# EAGLE board Logic_Level_Bidirectional-Panel-v01 (EAGLE 6.5.0), part 1 of 4
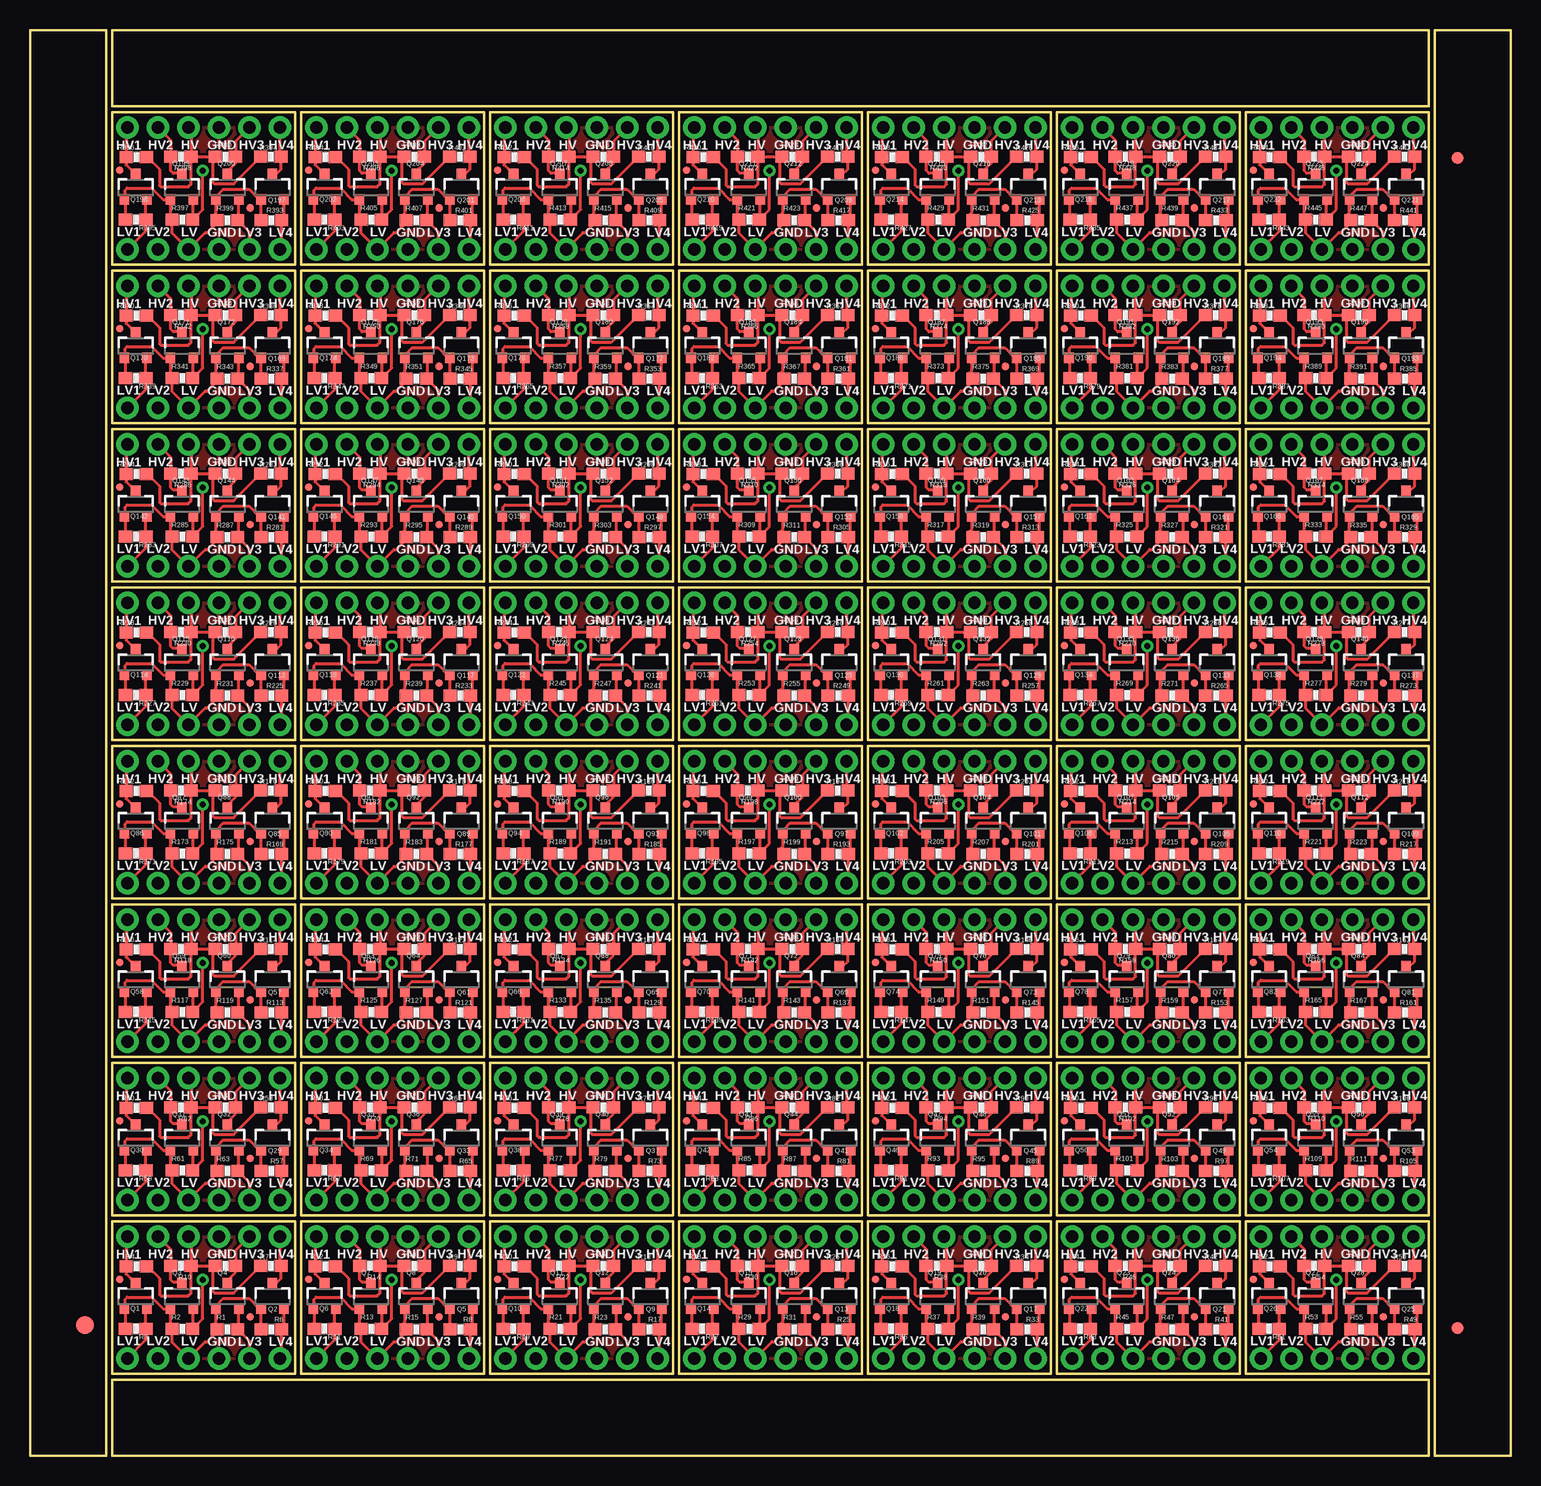
[diagram p0: board, top side]
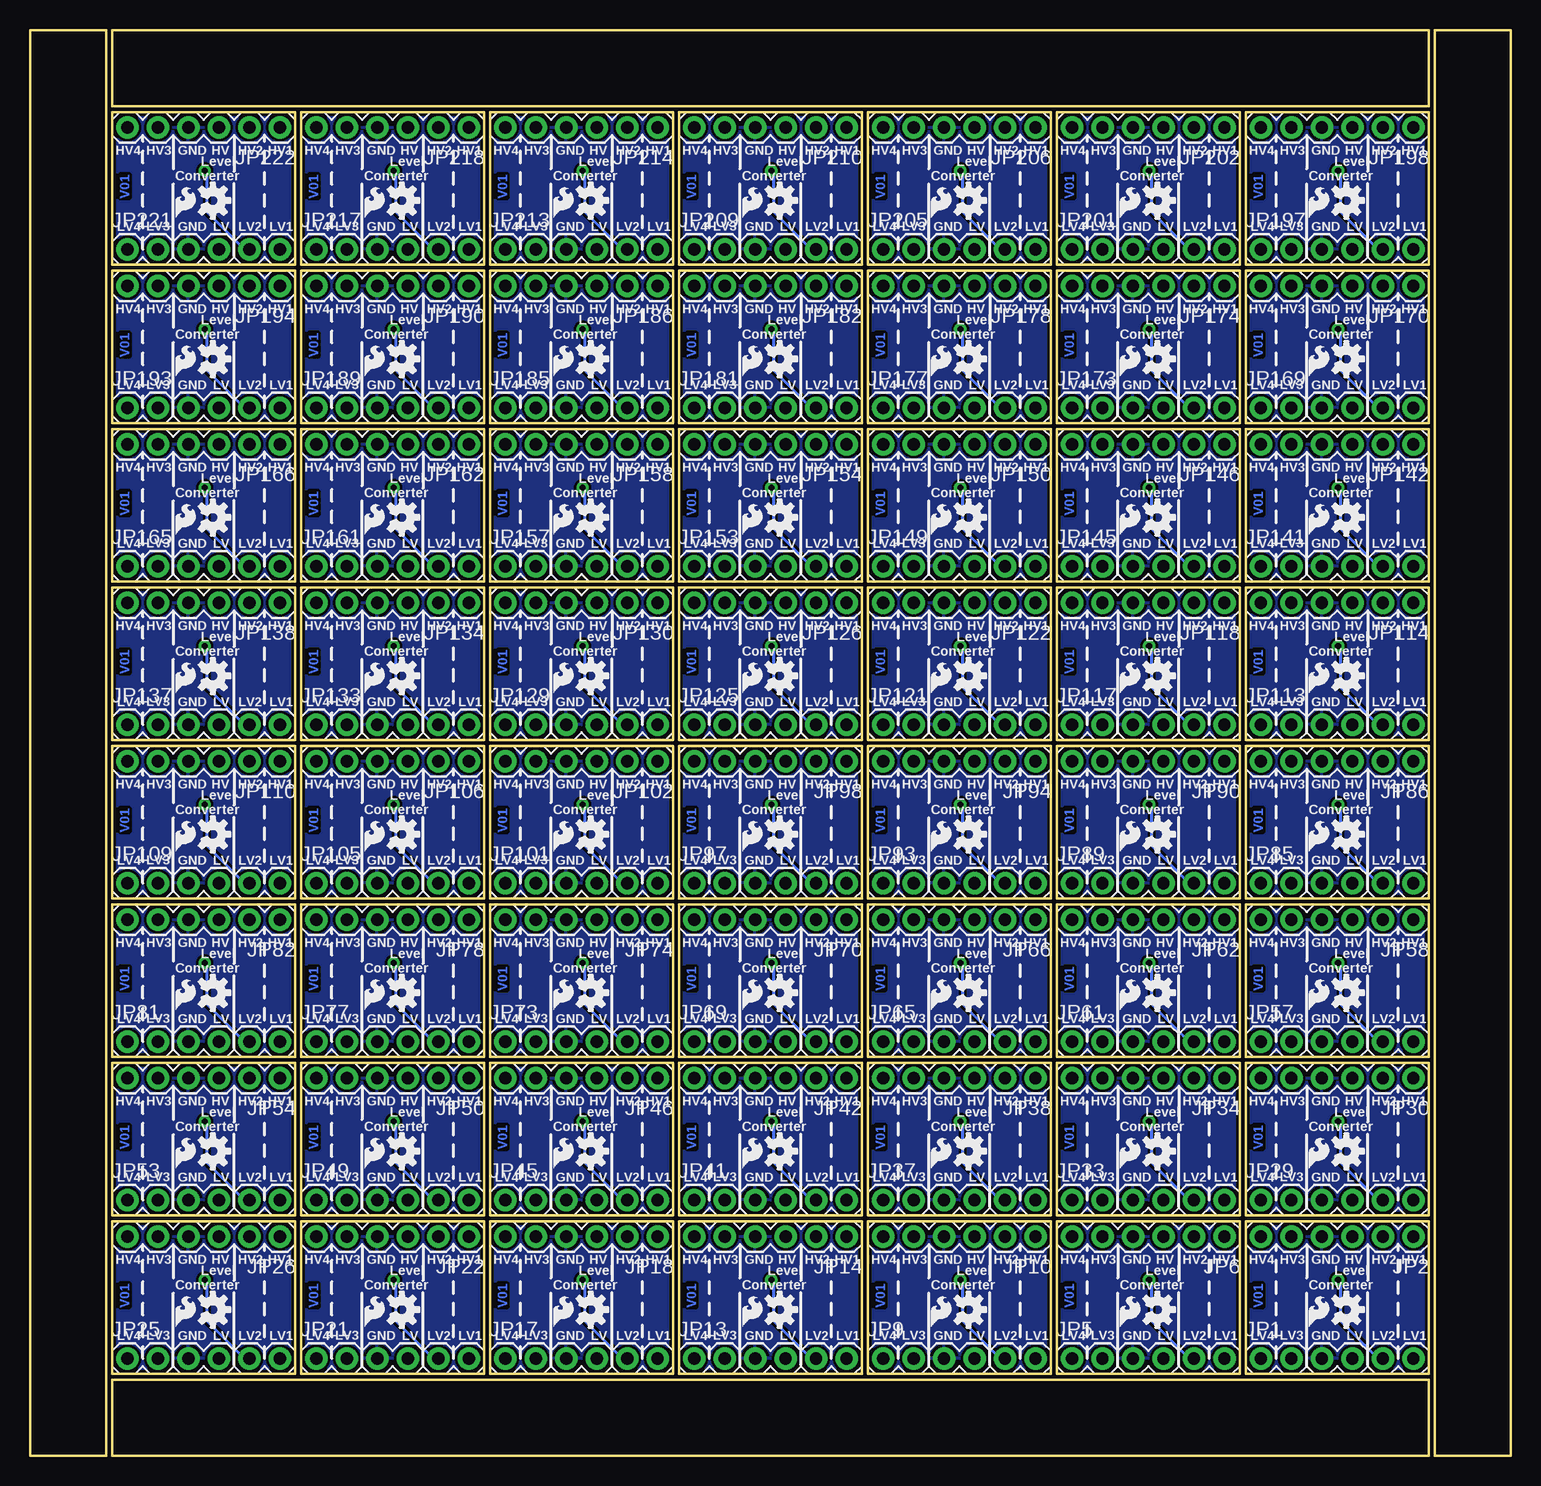
[diagram p1: board, bottom side, seen from below]

Size 123.44 x 118.87 mm. Coordinates in mm from the lower left corner, seen from the top.
Outline: 240 segments
Copper layers (1*16): Top 0.035mm / dielectric 1.5mm / Bottom 0.035mm
Design rules "SparkFun *": minimum track width 7mil, minimum drill 15mil, track to track 8mil, track to pad 8mil, pad to pad 8mil, via to via 8mil, smd to smd 8mil, copper to edge 8mil, drill to drill 8mil, minimum pad ring 12mil, minimum via ring 10mil, stop-mask expansion 4mil, vias tented up to drill 20mil, thermal gap 10mil

## Footprints (pad centres in the part's own frame; a part is rotated, then mirrored left to right if it is on the bottom)
FIDUCIAL-1.5X3 = smd 1.5 x 1.5: 1 0,0
FIDUCIAL-1X2 = smd 1 x 1: 1 0,0
1X06 = drill 1.016 pad 1.88: 1 0,0; 2 2.54,0; 3 5.08,0; 4 7.62,0; 5 10.16,0; 6 12.7,0
MICRO-FIDUCIAL = smd 0.635 x 0.635: 1 0,0
SOT23-3 = smd 0.8 x 0.9: 1 -0.95,-1; 2 0.95,-1; 3 0,1.1
0603-RES = smd 1.1 x 1: 1 -0.85,0; 2 0.85,0

## Placement (x,y rotation side)
E$1  [FIDUCIAL-1.5X3]  4.57,10.92 0 top
E$4  [FIDUCIAL-1X2]  119,10.67 0 top
E$5  [FIDUCIAL-1X2]  119,108.2 180 top
JP1  [1X06]  20.83,8.13 0 bottom
JP2  [1X06]  8.13,18.29 180 bottom
JP3  FIDUCIALUFIDUCIAL  [MICRO-FIDUCIAL]  7.49,14.73 0 top
JP4  FIDUCIALUFIDUCIAL  [MICRO-FIDUCIAL]  18.34,11.58 0 top
JP5  [1X06]  36.58,8.13 0 bottom
JP6  [1X06]  23.88,18.29 180 bottom
JP7  FIDUCIALUFIDUCIAL  [MICRO-FIDUCIAL]  23.24,14.73 0 top
JP8  FIDUCIALUFIDUCIAL  [MICRO-FIDUCIAL]  34.09,11.58 0 top
JP9  [1X06]  52.32,8.13 0 bottom
JP10  [1X06]  39.62,18.29 180 bottom
JP11  FIDUCIALUFIDUCIAL  [MICRO-FIDUCIAL]  38.99,14.73 0 top
JP12  FIDUCIALUFIDUCIAL  [MICRO-FIDUCIAL]  49.83,11.58 0 top
JP13  [1X06]  68.07,8.13 0 bottom
JP14  [1X06]  55.37,18.29 180 bottom
JP15  FIDUCIALUFIDUCIAL  [MICRO-FIDUCIAL]  54.74,14.73 0 top
JP16  FIDUCIALUFIDUCIAL  [MICRO-FIDUCIAL]  65.58,11.58 0 top
JP17  [1X06]  83.82,8.13 0 bottom
JP18  [1X06]  71.12,18.29 180 bottom
JP19  FIDUCIALUFIDUCIAL  [MICRO-FIDUCIAL]  70.48,14.73 0 top
JP20  FIDUCIALUFIDUCIAL  [MICRO-FIDUCIAL]  81.33,11.58 0 top
JP21  [1X06]  99.57,8.13 0 bottom
JP22  [1X06]  86.87,18.29 180 bottom
JP23  FIDUCIALUFIDUCIAL  [MICRO-FIDUCIAL]  86.23,14.73 0 top
JP24  FIDUCIALUFIDUCIAL  [MICRO-FIDUCIAL]  97.08,11.58 0 top
JP25  [1X06]  115.32,8.13 0 bottom
JP26  [1X06]  102.62,18.29 180 bottom
JP27  FIDUCIALUFIDUCIAL  [MICRO-FIDUCIAL]  101.98,14.73 0 top
JP28  FIDUCIALUFIDUCIAL  [MICRO-FIDUCIAL]  112.83,11.58 0 top
JP29  [1X06]  20.83,21.34 0 bottom
JP30  [1X06]  8.13,31.5 180 bottom
JP31  FIDUCIALUFIDUCIAL  [MICRO-FIDUCIAL]  7.49,27.94 0 top
JP32  FIDUCIALUFIDUCIAL  [MICRO-FIDUCIAL]  18.34,24.79 0 top
JP33  [1X06]  36.58,21.34 0 bottom
JP34  [1X06]  23.88,31.5 180 bottom
JP35  FIDUCIALUFIDUCIAL  [MICRO-FIDUCIAL]  23.24,27.94 0 top
JP36  FIDUCIALUFIDUCIAL  [MICRO-FIDUCIAL]  34.09,24.79 0 top
JP37  [1X06]  52.32,21.34 0 bottom
JP38  [1X06]  39.62,31.5 180 bottom
JP39  FIDUCIALUFIDUCIAL  [MICRO-FIDUCIAL]  38.99,27.94 0 top
JP40  FIDUCIALUFIDUCIAL  [MICRO-FIDUCIAL]  49.83,24.79 0 top
JP41  [1X06]  68.07,21.34 0 bottom
JP42  [1X06]  55.37,31.5 180 bottom
JP43  FIDUCIALUFIDUCIAL  [MICRO-FIDUCIAL]  54.74,27.94 0 top
JP44  FIDUCIALUFIDUCIAL  [MICRO-FIDUCIAL]  65.58,24.79 0 top
JP45  [1X06]  83.82,21.34 0 bottom
JP46  [1X06]  71.12,31.5 180 bottom
JP47  FIDUCIALUFIDUCIAL  [MICRO-FIDUCIAL]  70.48,27.94 0 top
JP48  FIDUCIALUFIDUCIAL  [MICRO-FIDUCIAL]  81.33,24.79 0 top
JP49  [1X06]  99.57,21.34 0 bottom
JP50  [1X06]  86.87,31.5 180 bottom
JP51  FIDUCIALUFIDUCIAL  [MICRO-FIDUCIAL]  86.23,27.94 0 top
JP52  FIDUCIALUFIDUCIAL  [MICRO-FIDUCIAL]  97.08,24.79 0 top
JP53  [1X06]  115.32,21.34 0 bottom
JP54  [1X06]  102.62,31.5 180 bottom
JP55  FIDUCIALUFIDUCIAL  [MICRO-FIDUCIAL]  101.98,27.94 0 top
JP56  FIDUCIALUFIDUCIAL  [MICRO-FIDUCIAL]  112.83,24.79 0 top
JP57  [1X06]  20.83,34.54 0 bottom
JP58  [1X06]  8.13,44.7 180 bottom
JP59  FIDUCIALUFIDUCIAL  [MICRO-FIDUCIAL]  7.49,41.15 0 top
JP60  FIDUCIALUFIDUCIAL  [MICRO-FIDUCIAL]  18.34,38 0 top
JP61  [1X06]  36.58,34.54 0 bottom
JP62  [1X06]  23.88,44.7 180 bottom
JP63  FIDUCIALUFIDUCIAL  [MICRO-FIDUCIAL]  23.24,41.15 0 top
JP64  FIDUCIALUFIDUCIAL  [MICRO-FIDUCIAL]  34.09,38 0 top
JP65  [1X06]  52.32,34.54 0 bottom
JP66  [1X06]  39.62,44.7 180 bottom
JP67  FIDUCIALUFIDUCIAL  [MICRO-FIDUCIAL]  38.99,41.15 0 top
JP68  FIDUCIALUFIDUCIAL  [MICRO-FIDUCIAL]  49.83,38 0 top
JP69  [1X06]  68.07,34.54 0 bottom
JP70  [1X06]  55.37,44.7 180 bottom
JP71  FIDUCIALUFIDUCIAL  [MICRO-FIDUCIAL]  54.74,41.15 0 top
JP72  FIDUCIALUFIDUCIAL  [MICRO-FIDUCIAL]  65.58,38 0 top
JP73  [1X06]  83.82,34.54 0 bottom
JP74  [1X06]  71.12,44.7 180 bottom
JP75  FIDUCIALUFIDUCIAL  [MICRO-FIDUCIAL]  70.48,41.15 0 top
JP76  FIDUCIALUFIDUCIAL  [MICRO-FIDUCIAL]  81.33,38 0 top
JP77  [1X06]  99.57,34.54 0 bottom
JP78  [1X06]  86.87,44.7 180 bottom
JP79  FIDUCIALUFIDUCIAL  [MICRO-FIDUCIAL]  86.23,41.15 0 top
JP80  FIDUCIALUFIDUCIAL  [MICRO-FIDUCIAL]  97.08,38 0 top
JP81  [1X06]  115.32,34.54 0 bottom
JP82  [1X06]  102.62,44.7 180 bottom
JP83  FIDUCIALUFIDUCIAL  [MICRO-FIDUCIAL]  101.98,41.15 0 top
JP84  FIDUCIALUFIDUCIAL  [MICRO-FIDUCIAL]  112.83,38 0 top
JP85  [1X06]  20.83,47.75 0 bottom
JP86  [1X06]  8.13,57.91 180 bottom
JP87  FIDUCIALUFIDUCIAL  [MICRO-FIDUCIAL]  7.49,54.36 0 top
JP88  FIDUCIALUFIDUCIAL  [MICRO-FIDUCIAL]  18.34,51.21 0 top
JP89  [1X06]  36.58,47.75 0 bottom
JP90  [1X06]  23.88,57.91 180 bottom
JP91  FIDUCIALUFIDUCIAL  [MICRO-FIDUCIAL]  23.24,54.36 0 top
JP92  FIDUCIALUFIDUCIAL  [MICRO-FIDUCIAL]  34.09,51.21 0 top
JP93  [1X06]  52.32,47.75 0 bottom
JP94  [1X06]  39.62,57.91 180 bottom
JP95  FIDUCIALUFIDUCIAL  [MICRO-FIDUCIAL]  38.99,54.36 0 top
JP96  FIDUCIALUFIDUCIAL  [MICRO-FIDUCIAL]  49.83,51.21 0 top
JP97  [1X06]  68.07,47.75 0 bottom
JP98  [1X06]  55.37,57.91 180 bottom
JP99  FIDUCIALUFIDUCIAL  [MICRO-FIDUCIAL]  54.74,54.36 0 top
JP100  FIDUCIALUFIDUCIAL  [MICRO-FIDUCIAL]  65.58,51.21 0 top
JP101  [1X06]  83.82,47.75 0 bottom
JP102  [1X06]  71.12,57.91 180 bottom
JP103  FIDUCIALUFIDUCIAL  [MICRO-FIDUCIAL]  70.48,54.36 0 top
JP104  FIDUCIALUFIDUCIAL  [MICRO-FIDUCIAL]  81.33,51.21 0 top
JP105  [1X06]  99.57,47.75 0 bottom
JP106  [1X06]  86.87,57.91 180 bottom
JP107  FIDUCIALUFIDUCIAL  [MICRO-FIDUCIAL]  86.23,54.36 0 top
JP108  FIDUCIALUFIDUCIAL  [MICRO-FIDUCIAL]  97.08,51.21 0 top
JP109  [1X06]  115.32,47.75 0 bottom
JP110  [1X06]  102.62,57.91 180 bottom
JP111  FIDUCIALUFIDUCIAL  [MICRO-FIDUCIAL]  101.98,54.36 0 top
JP112  FIDUCIALUFIDUCIAL  [MICRO-FIDUCIAL]  112.83,51.21 0 top
JP113  [1X06]  20.83,60.96 0 bottom
JP114  [1X06]  8.13,71.12 180 bottom
JP115  FIDUCIALUFIDUCIAL  [MICRO-FIDUCIAL]  7.49,67.56 0 top
JP116  FIDUCIALUFIDUCIAL  [MICRO-FIDUCIAL]  18.34,64.41 0 top
JP117  [1X06]  36.58,60.96 0 bottom
JP118  [1X06]  23.88,71.12 180 bottom
JP119  FIDUCIALUFIDUCIAL  [MICRO-FIDUCIAL]  23.24,67.56 0 top
JP120  FIDUCIALUFIDUCIAL  [MICRO-FIDUCIAL]  34.09,64.41 0 top
JP121  [1X06]  52.32,60.96 0 bottom
JP122  [1X06]  39.62,71.12 180 bottom
JP123  FIDUCIALUFIDUCIAL  [MICRO-FIDUCIAL]  38.99,67.56 0 top
JP124  FIDUCIALUFIDUCIAL  [MICRO-FIDUCIAL]  49.83,64.41 0 top
JP125  [1X06]  68.07,60.96 0 bottom
JP126  [1X06]  55.37,71.12 180 bottom
JP127  FIDUCIALUFIDUCIAL  [MICRO-FIDUCIAL]  54.74,67.56 0 top
JP128  FIDUCIALUFIDUCIAL  [MICRO-FIDUCIAL]  65.58,64.41 0 top
JP129  [1X06]  83.82,60.96 0 bottom
JP130  [1X06]  71.12,71.12 180 bottom
JP131  FIDUCIALUFIDUCIAL  [MICRO-FIDUCIAL]  70.48,67.56 0 top
JP132  FIDUCIALUFIDUCIAL  [MICRO-FIDUCIAL]  81.33,64.41 0 top
JP133  [1X06]  99.57,60.96 0 bottom
JP134  [1X06]  86.87,71.12 180 bottom
JP135  FIDUCIALUFIDUCIAL  [MICRO-FIDUCIAL]  86.23,67.56 0 top
JP136  FIDUCIALUFIDUCIAL  [MICRO-FIDUCIAL]  97.08,64.41 0 top
JP137  [1X06]  115.32,60.96 0 bottom
JP138  [1X06]  102.62,71.12 180 bottom
JP139  FIDUCIALUFIDUCIAL  [MICRO-FIDUCIAL]  101.98,67.56 0 top
JP140  FIDUCIALUFIDUCIAL  [MICRO-FIDUCIAL]  112.83,64.41 0 top
JP141  [1X06]  20.83,74.17 0 bottom
JP142  [1X06]  8.13,84.33 180 bottom
JP143  FIDUCIALUFIDUCIAL  [MICRO-FIDUCIAL]  7.49,80.77 0 top
JP144  FIDUCIALUFIDUCIAL  [MICRO-FIDUCIAL]  18.34,77.62 0 top
JP145  [1X06]  36.58,74.17 0 bottom
JP146  [1X06]  23.88,84.33 180 bottom
JP147  FIDUCIALUFIDUCIAL  [MICRO-FIDUCIAL]  23.24,80.77 0 top
JP148  FIDUCIALUFIDUCIAL  [MICRO-FIDUCIAL]  34.09,77.62 0 top
JP149  [1X06]  52.32,74.17 0 bottom
JP150  [1X06]  39.62,84.33 180 bottom
JP151  FIDUCIALUFIDUCIAL  [MICRO-FIDUCIAL]  38.99,80.77 0 top
JP152  FIDUCIALUFIDUCIAL  [MICRO-FIDUCIAL]  49.83,77.62 0 top
JP153  [1X06]  68.07,74.17 0 bottom
JP154  [1X06]  55.37,84.33 180 bottom
JP155  FIDUCIALUFIDUCIAL  [MICRO-FIDUCIAL]  54.74,80.77 0 top
JP156  FIDUCIALUFIDUCIAL  [MICRO-FIDUCIAL]  65.58,77.62 0 top
JP157  [1X06]  83.82,74.17 0 bottom
JP158  [1X06]  71.12,84.33 180 bottom
JP159  FIDUCIALUFIDUCIAL  [MICRO-FIDUCIAL]  70.48,80.77 0 top
JP160  FIDUCIALUFIDUCIAL  [MICRO-FIDUCIAL]  81.33,77.62 0 top
JP161  [1X06]  99.57,74.17 0 bottom
JP162  [1X06]  86.87,84.33 180 bottom
JP163  FIDUCIALUFIDUCIAL  [MICRO-FIDUCIAL]  86.23,80.77 0 top
JP164  FIDUCIALUFIDUCIAL  [MICRO-FIDUCIAL]  97.08,77.62 0 top
JP165  [1X06]  115.32,74.17 0 bottom
JP166  [1X06]  102.62,84.33 180 bottom
JP167  FIDUCIALUFIDUCIAL  [MICRO-FIDUCIAL]  101.98,80.77 0 top
JP168  FIDUCIALUFIDUCIAL  [MICRO-FIDUCIAL]  112.83,77.62 0 top
JP169  [1X06]  20.83,87.38 0 bottom
JP170  [1X06]  8.13,97.54 180 bottom
JP171  FIDUCIALUFIDUCIAL  [MICRO-FIDUCIAL]  7.49,93.98 0 top
JP172  FIDUCIALUFIDUCIAL  [MICRO-FIDUCIAL]  18.34,90.83 0 top
JP173  [1X06]  36.58,87.38 0 bottom
JP174  [1X06]  23.88,97.54 180 bottom
JP175  FIDUCIALUFIDUCIAL  [MICRO-FIDUCIAL]  23.24,93.98 0 top
JP176  FIDUCIALUFIDUCIAL  [MICRO-FIDUCIAL]  34.09,90.83 0 top
JP177  [1X06]  52.32,87.38 0 bottom
JP178  [1X06]  39.62,97.54 180 bottom
JP179  FIDUCIALUFIDUCIAL  [MICRO-FIDUCIAL]  38.99,93.98 0 top
JP180  FIDUCIALUFIDUCIAL  [MICRO-FIDUCIAL]  49.83,90.83 0 top
JP181  [1X06]  68.07,87.38 0 bottom
JP182  [1X06]  55.37,97.54 180 bottom
JP183  FIDUCIALUFIDUCIAL  [MICRO-FIDUCIAL]  54.74,93.98 0 top
JP184  FIDUCIALUFIDUCIAL  [MICRO-FIDUCIAL]  65.58,90.83 0 top
JP185  [1X06]  83.82,87.38 0 bottom
JP186  [1X06]  71.12,97.54 180 bottom
JP187  FIDUCIALUFIDUCIAL  [MICRO-FIDUCIAL]  70.48,93.98 0 top
JP188  FIDUCIALUFIDUCIAL  [MICRO-FIDUCIAL]  81.33,90.83 0 top
JP189  [1X06]  99.57,87.38 0 bottom
JP190  [1X06]  86.87,97.54 180 bottom
JP191  FIDUCIALUFIDUCIAL  [MICRO-FIDUCIAL]  86.23,93.98 0 top
JP192  FIDUCIALUFIDUCIAL  [MICRO-FIDUCIAL]  97.08,90.83 0 top
JP193  [1X06]  115.32,87.38 0 bottom
JP194  [1X06]  102.62,97.54 180 bottom
JP195  FIDUCIALUFIDUCIAL  [MICRO-FIDUCIAL]  101.98,93.98 0 top
JP196  FIDUCIALUFIDUCIAL  [MICRO-FIDUCIAL]  112.83,90.83 0 top
JP197  [1X06]  20.83,100.58 0 bottom
JP198  [1X06]  8.13,110.74 180 bottom
JP199  FIDUCIALUFIDUCIAL  [MICRO-FIDUCIAL]  7.49,107.19 0 top
JP200  FIDUCIALUFIDUCIAL  [MICRO-FIDUCIAL]  18.34,104.04 0 top
JP201  [1X06]  36.58,100.58 0 bottom
JP202  [1X06]  23.88,110.74 180 bottom
JP203  FIDUCIALUFIDUCIAL  [MICRO-FIDUCIAL]  23.24,107.19 0 top
JP204  FIDUCIALUFIDUCIAL  [MICRO-FIDUCIAL]  34.09,104.04 0 top
JP205  [1X06]  52.32,100.58 0 bottom
JP206  [1X06]  39.62,110.74 180 bottom
JP207  FIDUCIALUFIDUCIAL  [MICRO-FIDUCIAL]  38.99,107.19 0 top
JP208  FIDUCIALUFIDUCIAL  [MICRO-FIDUCIAL]  49.83,104.04 0 top
JP209  [1X06]  68.07,100.58 0 bottom
JP210  [1X06]  55.37,110.74 180 bottom
JP211  FIDUCIALUFIDUCIAL  [MICRO-FIDUCIAL]  54.74,107.19 0 top
JP212  FIDUCIALUFIDUCIAL  [MICRO-FIDUCIAL]  65.58,104.04 0 top
JP213  [1X06]  83.82,100.58 0 bottom
JP214  [1X06]  71.12,110.74 180 bottom
JP215  FIDUCIALUFIDUCIAL  [MICRO-FIDUCIAL]  70.48,107.19 0 top
JP216  FIDUCIALUFIDUCIAL  [MICRO-FIDUCIAL]  81.33,104.04 0 top
JP217  [1X06]  99.57,100.58 0 bottom
JP218  [1X06]  86.87,110.74 180 bottom
JP219  FIDUCIALUFIDUCIAL  [MICRO-FIDUCIAL]  86.23,107.19 0 top
JP220  FIDUCIALUFIDUCIAL  [MICRO-FIDUCIAL]  97.08,104.04 0 top
JP221  [1X06]  115.32,100.58 0 bottom
JP222  [1X06]  102.62,110.74 180 bottom
JP223  FIDUCIALUFIDUCIAL  [MICRO-FIDUCIAL]  101.98,107.19 0 top
JP224  FIDUCIALUFIDUCIAL  [MICRO-FIDUCIAL]  112.83,104.04 0 top
LOGO1  SFE_LOGO_FLAME.1_INCH  [SFE_LOGO_FLAME_.1]  17.14,10.41 0 bottom
LOGO2  OSHW-LOGOS  [OSHW-LOGO-S]  13.72,12.19 270 bottom
LOGO3  SFE_LOGO_FLAME.1_INCH  [SFE_LOGO_FLAME_.1]  32.89,10.41 0 bottom
LOGO4  OSHW-LOGOS  [OSHW-LOGO-S]  29.46,12.19 270 bottom
LOGO5  SFE_LOGO_FLAME.1_INCH  [SFE_LOGO_FLAME_.1]  48.64,10.41 0 bottom
LOGO6  OSHW-LOGOS  [OSHW-LOGO-S]  45.21,12.19 270 bottom
LOGO7  SFE_LOGO_FLAME.1_INCH  [SFE_LOGO_FLAME_.1]  64.39,10.41 0 bottom
LOGO8  OSHW-LOGOS  [OSHW-LOGO-S]  60.96,12.19 270 bottom
LOGO9  SFE_LOGO_FLAME.1_INCH  [SFE_LOGO_FLAME_.1]  80.14,10.41 0 bottom
LOGO10  OSHW-LOGOS  [OSHW-LOGO-S]  76.71,12.19 270 bottom
LOGO11  SFE_LOGO_FLAME.1_INCH  [SFE_LOGO_FLAME_.1]  95.89,10.41 0 bottom
LOGO12  OSHW-LOGOS  [OSHW-LOGO-S]  92.46,12.19 270 bottom
LOGO13  SFE_LOGO_FLAME.1_INCH  [SFE_LOGO_FLAME_.1]  111.63,10.41 0 bottom
LOGO14  OSHW-LOGOS  [OSHW-LOGO-S]  108.2,12.19 270 bottom
LOGO15  SFE_LOGO_FLAME.1_INCH  [SFE_LOGO_FLAME_.1]  17.14,23.62 0 bottom
LOGO16  OSHW-LOGOS  [OSHW-LOGO-S]  13.72,25.4 270 bottom
LOGO17  SFE_LOGO_FLAME.1_INCH  [SFE_LOGO_FLAME_.1]  32.89,23.62 0 bottom
LOGO18  OSHW-LOGOS  [OSHW-LOGO-S]  29.46,25.4 270 bottom
LOGO19  SFE_LOGO_FLAME.1_INCH  [SFE_LOGO_FLAME_.1]  48.64,23.62 0 bottom
LOGO20  OSHW-LOGOS  [OSHW-LOGO-S]  45.21,25.4 270 bottom
LOGO21  SFE_LOGO_FLAME.1_INCH  [SFE_LOGO_FLAME_.1]  64.39,23.62 0 bottom
LOGO22  OSHW-LOGOS  [OSHW-LOGO-S]  60.96,25.4 270 bottom
LOGO23  SFE_LOGO_FLAME.1_INCH  [SFE_LOGO_FLAME_.1]  80.14,23.62 0 bottom
LOGO24  OSHW-LOGOS  [OSHW-LOGO-S]  76.71,25.4 270 bottom
LOGO25  SFE_LOGO_FLAME.1_INCH  [SFE_LOGO_FLAME_.1]  95.89,23.62 0 bottom
LOGO26  OSHW-LOGOS  [OSHW-LOGO-S]  92.46,25.4 270 bottom
LOGO27  SFE_LOGO_FLAME.1_INCH  [SFE_LOGO_FLAME_.1]  111.63,23.62 0 bottom
LOGO28  OSHW-LOGOS  [OSHW-LOGO-S]  108.2,25.4 270 bottom
LOGO29  SFE_LOGO_FLAME.1_INCH  [SFE_LOGO_FLAME_.1]  17.14,36.83 0 bottom
LOGO30  OSHW-LOGOS  [OSHW-LOGO-S]  13.72,38.61 270 bottom
LOGO31  SFE_LOGO_FLAME.1_INCH  [SFE_LOGO_FLAME_.1]  32.89,36.83 0 bottom
LOGO32  OSHW-LOGOS  [OSHW-LOGO-S]  29.46,38.61 270 bottom
LOGO33  SFE_LOGO_FLAME.1_INCH  [SFE_LOGO_FLAME_.1]  48.64,36.83 0 bottom
LOGO34  OSHW-LOGOS  [OSHW-LOGO-S]  45.21,38.61 270 bottom
LOGO35  SFE_LOGO_FLAME.1_INCH  [SFE_LOGO_FLAME_.1]  64.39,36.83 0 bottom
LOGO36  OSHW-LOGOS  [OSHW-LOGO-S]  60.96,38.61 270 bottom
LOGO37  SFE_LOGO_FLAME.1_INCH  [SFE_LOGO_FLAME_.1]  80.14,36.83 0 bottom
LOGO38  OSHW-LOGOS  [OSHW-LOGO-S]  76.71,38.61 270 bottom
LOGO39  SFE_LOGO_FLAME.1_INCH  [SFE_LOGO_FLAME_.1]  95.89,36.83 0 bottom
LOGO40  OSHW-LOGOS  [OSHW-LOGO-S]  92.46,38.61 270 bottom
LOGO41  SFE_LOGO_FLAME.1_INCH  [SFE_LOGO_FLAME_.1]  111.63,36.83 0 bottom
LOGO42  OSHW-LOGOS  [OSHW-LOGO-S]  108.2,38.61 270 bottom
LOGO43  SFE_LOGO_FLAME.1_INCH  [SFE_LOGO_FLAME_.1]  17.14,50.04 0 bottom
LOGO44  OSHW-LOGOS  [OSHW-LOGO-S]  13.72,51.82 270 bottom
LOGO45  SFE_LOGO_FLAME.1_INCH  [SFE_LOGO_FLAME_.1]  32.89,50.04 0 bottom
LOGO46  OSHW-LOGOS  [OSHW-LOGO-S]  29.46,51.82 270 bottom
LOGO47  SFE_LOGO_FLAME.1_INCH  [SFE_LOGO_FLAME_.1]  48.64,50.04 0 bottom
LOGO48  OSHW-LOGOS  [OSHW-LOGO-S]  45.21,51.82 270 bottom
LOGO49  SFE_LOGO_FLAME.1_INCH  [SFE_LOGO_FLAME_.1]  64.39,50.04 0 bottom
LOGO50  OSHW-LOGOS  [OSHW-LOGO-S]  60.96,51.82 270 bottom
LOGO51  SFE_LOGO_FLAME.1_INCH  [SFE_LOGO_FLAME_.1]  80.14,50.04 0 bottom
LOGO52  OSHW-LOGOS  [OSHW-LOGO-S]  76.71,51.82 270 bottom
LOGO53  SFE_LOGO_FLAME.1_INCH  [SFE_LOGO_FLAME_.1]  95.89,50.04 0 bottom
LOGO54  OSHW-LOGOS  [OSHW-LOGO-S]  92.46,51.82 270 bottom
LOGO55  SFE_LOGO_FLAME.1_INCH  [SFE_LOGO_FLAME_.1]  111.63,50.04 0 bottom
LOGO56  OSHW-LOGOS  [OSHW-LOGO-S]  108.2,51.82 270 bottom
LOGO57  SFE_LOGO_FLAME.1_INCH  [SFE_LOGO_FLAME_.1]  17.14,63.25 0 bottom
LOGO58  OSHW-LOGOS  [OSHW-LOGO-S]  13.72,65.02 270 bottom
LOGO59  SFE_LOGO_FLAME.1_INCH  [SFE_LOGO_FLAME_.1]  32.89,63.25 0 bottom
LOGO60  OSHW-LOGOS  [OSHW-LOGO-S]  29.46,65.02 270 bottom
LOGO61  SFE_LOGO_FLAME.1_INCH  [SFE_LOGO_FLAME_.1]  48.64,63.25 0 bottom
LOGO62  OSHW-LOGOS  [OSHW-LOGO-S]  45.21,65.02 270 bottom
LOGO63  SFE_LOGO_FLAME.1_INCH  [SFE_LOGO_FLAME_.1]  64.39,63.25 0 bottom
LOGO64  OSHW-LOGOS  [OSHW-LOGO-S]  60.96,65.02 270 bottom
LOGO65  SFE_LOGO_FLAME.1_INCH  [SFE_LOGO_FLAME_.1]  80.14,63.25 0 bottom
LOGO66  OSHW-LOGOS  [OSHW-LOGO-S]  76.71,65.02 270 bottom
LOGO67  SFE_LOGO_FLAME.1_INCH  [SFE_LOGO_FLAME_.1]  95.89,63.25 0 bottom
LOGO68  OSHW-LOGOS  [OSHW-LOGO-S]  92.46,65.02 270 bottom
LOGO69  SFE_LOGO_FLAME.1_INCH  [SFE_LOGO_FLAME_.1]  111.63,63.25 0 bottom
LOGO70  OSHW-LOGOS  [OSHW-LOGO-S]  108.2,65.02 270 bottom
LOGO71  SFE_LOGO_FLAME.1_INCH  [SFE_LOGO_FLAME_.1]  17.14,76.45 0 bottom
LOGO72  OSHW-LOGOS  [OSHW-LOGO-S]  13.72,78.23 270 bottom
LOGO73  SFE_LOGO_FLAME.1_INCH  [SFE_LOGO_FLAME_.1]  32.89,76.45 0 bottom
LOGO74  OSHW-LOGOS  [OSHW-LOGO-S]  29.46,78.23 270 bottom
LOGO75  SFE_LOGO_FLAME.1_INCH  [SFE_LOGO_FLAME_.1]  48.64,76.45 0 bottom
LOGO76  OSHW-LOGOS  [OSHW-LOGO-S]  45.21,78.23 270 bottom
LOGO77  SFE_LOGO_FLAME.1_INCH  [SFE_LOGO_FLAME_.1]  64.39,76.45 0 bottom
LOGO78  OSHW-LOGOS  [OSHW-LOGO-S]  60.96,78.23 270 bottom
LOGO79  SFE_LOGO_FLAME.1_INCH  [SFE_LOGO_FLAME_.1]  80.14,76.45 0 bottom
LOGO80  OSHW-LOGOS  [OSHW-LOGO-S]  76.71,78.23 270 bottom
LOGO81  SFE_LOGO_FLAME.1_INCH  [SFE_LOGO_FLAME_.1]  95.89,76.45 0 bottom
LOGO82  OSHW-LOGOS  [OSHW-LOGO-S]  92.46,78.23 270 bottom
LOGO83  SFE_LOGO_FLAME.1_INCH  [SFE_LOGO_FLAME_.1]  111.63,76.45 0 bottom
LOGO84  OSHW-LOGOS  [OSHW-LOGO-S]  108.2,78.23 270 bottom
LOGO85  SFE_LOGO_FLAME.1_INCH  [SFE_LOGO_FLAME_.1]  17.14,89.66 0 bottom
LOGO86  OSHW-LOGOS  [OSHW-LOGO-S]  13.72,91.44 270 bottom
LOGO87  SFE_LOGO_FLAME.1_INCH  [SFE_LOGO_FLAME_.1]  32.89,89.66 0 bottom
LOGO88  OSHW-LOGOS  [OSHW-LOGO-S]  29.46,91.44 270 bottom
LOGO89  SFE_LOGO_FLAME.1_INCH  [SFE_LOGO_FLAME_.1]  48.64,89.66 0 bottom
LOGO90  OSHW-LOGOS  [OSHW-LOGO-S]  45.21,91.44 270 bottom
LOGO91  SFE_LOGO_FLAME.1_INCH  [SFE_LOGO_FLAME_.1]  64.39,89.66 0 bottom
LOGO92  OSHW-LOGOS  [OSHW-LOGO-S]  60.96,91.44 270 bottom
LOGO93  SFE_LOGO_FLAME.1_INCH  [SFE_LOGO_FLAME_.1]  80.14,89.66 0 bottom
LOGO94  OSHW-LOGOS  [OSHW-LOGO-S]  76.71,91.44 270 bottom
LOGO95  SFE_LOGO_FLAME.1_INCH  [SFE_LOGO_FLAME_.1]  95.89,89.66 0 bottom
LOGO96  OSHW-LOGOS  [OSHW-LOGO-S]  92.46,91.44 270 bottom
LOGO97  SFE_LOGO_FLAME.1_INCH  [SFE_LOGO_FLAME_.1]  111.63,89.66 0 bottom
LOGO98  OSHW-LOGOS  [OSHW-LOGO-S]  108.2,91.44 270 bottom
LOGO99  SFE_LOGO_FLAME.1_INCH  [SFE_LOGO_FLAME_.1]  17.14,102.87 0 bottom
LOGO100  OSHW-LOGOS  [OSHW-LOGO-S]  13.72,104.65 270 bottom
LOGO101  SFE_LOGO_FLAME.1_INCH  [SFE_LOGO_FLAME_.1]  32.89,102.87 0 bottom
LOGO102  OSHW-LOGOS  [OSHW-LOGO-S]  29.46,104.65 270 bottom
LOGO103  SFE_LOGO_FLAME.1_INCH  [SFE_LOGO_FLAME_.1]  48.64,102.87 0 bottom
LOGO104  OSHW-LOGOS  [OSHW-LOGO-S]  45.21,104.65 270 bottom
LOGO105  SFE_LOGO_FLAME.1_INCH  [SFE_LOGO_FLAME_.1]  64.39,102.87 0 bottom
LOGO106  OSHW-LOGOS  [OSHW-LOGO-S]  60.96,104.65 270 bottom
LOGO107  SFE_LOGO_FLAME.1_INCH  [SFE_LOGO_FLAME_.1]  80.14,102.87 0 bottom
LOGO108  OSHW-LOGOS  [OSHW-LOGO-S]  76.71,104.65 270 bottom
LOGO109  SFE_LOGO_FLAME.1_INCH  [SFE_LOGO_FLAME_.1]  95.89,102.87 0 bottom
LOGO110  OSHW-LOGOS  [OSHW-LOGO-S]  92.46,104.65 270 bottom
LOGO111  SFE_LOGO_FLAME.1_INCH  [SFE_LOGO_FLAME_.1]  111.63,102.87 0 bottom
LOGO112  OSHW-LOGOS  [OSHW-LOGO-S]  108.2,104.65 270 bottom
Q1  BSS138  [SOT23-3]  8.81,13.28 0 top
Q2  BSS138  [SOT23-3]  20.22,13.28 0 top
Q3  BSS138  [SOT23-3]  12.67,13.28 0 top
Q4  BSS138  [SOT23-3]  16.46,13.28 0 top
Q5  BSS138  [SOT23-3]  35.97,13.28 0 top
Q6  BSS138  [SOT23-3]  24.56,13.28 0 top
Q7  BSS138  [SOT23-3]  28.42,13.28 0 top
Q8  BSS138  [SOT23-3]  32.21,13.28 0 top
Q9  BSS138  [SOT23-3]  51.71,13.28 0 top
Q10  BSS138  [SOT23-3]  40.31,13.28 0 top
Q11  BSS138  [SOT23-3]  44.17,13.28 0 top
Q12  BSS138  [SOT23-3]  47.96,13.28 0 top
Q13  BSS138  [SOT23-3]  67.46,13.28 0 top
Q14  BSS138  [SOT23-3]  56.06,13.28 0 top
Q15  BSS138  [SOT23-3]  59.92,13.28 0 top
Q16  BSS138  [SOT23-3]  63.7,13.28 0 top
Q17  BSS138  [SOT23-3]  83.21,13.28 0 top
Q18  BSS138  [SOT23-3]  71.81,13.28 0 top
Q19  BSS138  [SOT23-3]  75.67,13.28 0 top
Q20  BSS138  [SOT23-3]  79.45,13.28 0 top
Q21  BSS138  [SOT23-3]  98.96,13.28 0 top
Q22  BSS138  [SOT23-3]  87.55,13.28 0 top
Q23  BSS138  [SOT23-3]  91.41,13.28 0 top
Q24  BSS138  [SOT23-3]  95.2,13.28 0 top
Q25  BSS138  [SOT23-3]  114.71,13.28 0 top
Q26  BSS138  [SOT23-3]  103.3,13.28 0 top
Q27  BSS138  [SOT23-3]  107.16,13.28 0 top
Q28  BSS138  [SOT23-3]  110.95,13.28 0 top
Q29  BSS138  [SOT23-3]  20.22,26.49 0 top
Q30  BSS138  [SOT23-3]  8.81,26.49 0 top
Q31  BSS138  [SOT23-3]  12.67,26.49 0 top
Q32  BSS138  [SOT23-3]  16.46,26.49 0 top
Q33  BSS138  [SOT23-3]  35.97,26.49 0 top
Q34  BSS138  [SOT23-3]  24.56,26.49 0 top
Q35  BSS138  [SOT23-3]  28.42,26.49 0 top
Q36  BSS138  [SOT23-3]  32.21,26.49 0 top
Q37  BSS138  [SOT23-3]  51.71,26.49 0 top
Q38  BSS138  [SOT23-3]  40.31,26.49 0 top
Q39  BSS138  [SOT23-3]  44.17,26.49 0 top
Q40  BSS138  [SOT23-3]  47.96,26.49 0 top
Q41  BSS138  [SOT23-3]  67.46,26.49 0 top
Q42  BSS138  [SOT23-3]  56.06,26.49 0 top
Q43  BSS138  [SOT23-3]  59.92,26.49 0 top
Q44  BSS138  [SOT23-3]  63.7,26.49 0 top
Q45  BSS138  [SOT23-3]  83.21,26.49 0 top
Q46  BSS138  [SOT23-3]  71.81,26.49 0 top
Q47  BSS138  [SOT23-3]  75.67,26.49 0 top
Q48  BSS138  [SOT23-3]  79.45,26.49 0 top
Q49  BSS138  [SOT23-3]  98.96,26.49 0 top
Q50  BSS138  [SOT23-3]  87.55,26.49 0 top
Q51  BSS138  [SOT23-3]  91.41,26.49 0 top
Q52  BSS138  [SOT23-3]  95.2,26.49 0 top
Q53  BSS138  [SOT23-3]  114.71,26.49 0 top
Q54  BSS138  [SOT23-3]  103.3,26.49 0 top
Q55  BSS138  [SOT23-3]  107.16,26.49 0 top
Q56  BSS138  [SOT23-3]  110.95,26.49 0 top
Q57  BSS138  [SOT23-3]  20.22,39.7 0 top
Q58  BSS138  [SOT23-3]  8.81,39.7 0 top
Q59  BSS138  [SOT23-3]  12.67,39.7 0 top
Q60  BSS138  [SOT23-3]  16.46,39.7 0 top
Q61  BSS138  [SOT23-3]  35.97,39.7 0 top
Q62  BSS138  [SOT23-3]  24.56,39.7 0 top
Q63  BSS138  [SOT23-3]  28.42,39.7 0 top
Q64  BSS138  [SOT23-3]  32.21,39.7 0 top
Q65  BSS138  [SOT23-3]  51.71,39.7 0 top
Q66  BSS138  [SOT23-3]  40.31,39.7 0 top
Q67  BSS138  [SOT23-3]  44.17,39.7 0 top
Q68  BSS138  [SOT23-3]  47.96,39.7 0 top
Q69  BSS138  [SOT23-3]  67.46,39.7 0 top
Q70  BSS138  [SOT23-3]  56.06,39.7 0 top
Q71  BSS138  [SOT23-3]  59.92,39.7 0 top
Q72  BSS138  [SOT23-3]  63.7,39.7 0 top
Q73  BSS138  [SOT23-3]  83.21,39.7 0 top
Q74  BSS138  [SOT23-3]  71.81,39.7 0 top
Q75  BSS138  [SOT23-3]  75.67,39.7 0 top
Q76  BSS138  [SOT23-3]  79.45,39.7 0 top
Q77  BSS138  [SOT23-3]  98.96,39.7 0 top
Q78  BSS138  [SOT23-3]  87.55,39.7 0 top
Q79  BSS138  [SOT23-3]  91.41,39.7 0 top
Q80  BSS138  [SOT23-3]  95.2,39.7 0 top
Q81  BSS138  [SOT23-3]  114.71,39.7 0 top
Q82  BSS138  [SOT23-3]  103.3,39.7 0 top
Q83  BSS138  [SOT23-3]  107.16,39.7 0 top
Q84  BSS138  [SOT23-3]  110.95,39.7 0 top
Q85  BSS138  [SOT23-3]  20.22,52.91 0 top
Q86  BSS138  [SOT23-3]  8.81,52.91 0 top
Q87  BSS138  [SOT23-3]  12.67,52.91 0 top
Q88  BSS138  [SOT23-3]  16.46,52.91 0 top
Q89  BSS138  [SOT23-3]  35.97,52.91 0 top
Q90  BSS138  [SOT23-3]  24.56,52.91 0 top
Q91  BSS138  [SOT23-3]  28.42,52.91 0 top
Q92  BSS138  [SOT23-3]  32.21,52.91 0 top
Q93  BSS138  [SOT23-3]  51.71,52.91 0 top
Q94  BSS138  [SOT23-3]  40.31,52.91 0 top
Q95  BSS138  [SOT23-3]  44.17,52.91 0 top
Q96  BSS138  [SOT23-3]  47.96,52.91 0 top
Q97  BSS138  [SOT23-3]  67.46,52.91 0 top
Q98  BSS138  [SOT23-3]  56.06,52.91 0 top
Q99  BSS138  [SOT23-3]  59.92,52.91 0 top
Q100  BSS138  [SOT23-3]  63.7,52.91 0 top
Q101  BSS138  [SOT23-3]  83.21,52.91 0 top
Q102  BSS138  [SOT23-3]  71.81,52.91 0 top
Q103  BSS138  [SOT23-3]  75.67,52.91 0 top
Q104  BSS138  [SOT23-3]  79.45,52.91 0 top
Q105  BSS138  [SOT23-3]  98.96,52.91 0 top
Q106  BSS138  [SOT23-3]  87.55,52.91 0 top
Q107  BSS138  [SOT23-3]  91.41,52.91 0 top
Q108  BSS138  [SOT23-3]  95.2,52.91 0 top
Q109  BSS138  [SOT23-3]  114.71,52.91 0 top
Q110  BSS138  [SOT23-3]  103.3,52.91 0 top
Q111  BSS138  [SOT23-3]  107.16,52.91 0 top
Q112  BSS138  [SOT23-3]  110.95,52.91 0 top
Q113  BSS138  [SOT23-3]  20.22,66.12 0 top
Q114  BSS138  [SOT23-3]  8.81,66.12 0 top
Q115  BSS138  [SOT23-3]  12.67,66.12 0 top
Q116  BSS138  [SOT23-3]  16.46,66.12 0 top
Q117  BSS138  [SOT23-3]  35.97,66.12 0 top
Q118  BSS138  [SOT23-3]  24.56,66.12 0 top
Q119  BSS138  [SOT23-3]  28.42,66.12 0 top
Q120  BSS138  [SOT23-3]  32.21,66.12 0 top
Q121  BSS138  [SOT23-3]  51.71,66.12 0 top
Q122  BSS138  [SOT23-3]  40.31,66.12 0 top
Q123  BSS138  [SOT23-3]  44.17,66.12 0 top
Q124  BSS138  [SOT23-3]  47.96,66.12 0 top
Q125  BSS138  [SOT23-3]  67.46,66.12 0 top
Q126  BSS138  [SOT23-3]  56.06,66.12 0 top
Q127  BSS138  [SOT23-3]  59.92,66.12 0 top
Q128  BSS138  [SOT23-3]  63.7,66.12 0 top
Q129  BSS138  [SOT23-3]  83.21,66.12 0 top
Q130  BSS138  [SOT23-3]  71.81,66.12 0 top
Q131  BSS138  [SOT23-3]  75.67,66.12 0 top
Q132  BSS138  [SOT23-3]  79.45,66.12 0 top
Q133  BSS138  [SOT23-3]  98.96,66.12 0 top
Q134  BSS138  [SOT23-3]  87.55,66.12 0 top
Q135  BSS138  [SOT23-3]  91.41,66.12 0 top
Q136  BSS138  [SOT23-3]  95.2,66.12 0 top
Q137  BSS138  [SOT23-3]  114.71,66.12 0 top
Q138  BSS138  [SOT23-3]  103.3,66.12 0 top
Q139  BSS138  [SOT23-3]  107.16,66.12 0 top
Q140  BSS138  [SOT23-3]  110.95,66.12 0 top
Q141  BSS138  [SOT23-3]  20.22,79.32 0 top
Q142  BSS138  [SOT23-3]  8.81,79.32 0 top
Q143  BSS138  [SOT23-3]  12.67,79.32 0 top
Q144  BSS138  [SOT23-3]  16.46,79.32 0 top
Q145  BSS138  [SOT23-3]  35.97,79.32 0 top
Q146  BSS138  [SOT23-3]  24.56,79.32 0 top
Q147  BSS138  [SOT23-3]  28.42,79.32 0 top
Q148  BSS138  [SOT23-3]  32.21,79.32 0 top
Q149  BSS138  [SOT23-3]  51.71,79.32 0 top
Q150  BSS138  [SOT23-3]  40.31,79.32 0 top
Q151  BSS138  [SOT23-3]  44.17,79.32 0 top
Q152  BSS138  [SOT23-3]  47.96,79.32 0 top
Q153  BSS138  [SOT23-3]  67.46,79.32 0 top
Q154  BSS138  [SOT23-3]  56.06,79.32 0 top
Q155  BSS138  [SOT23-3]  59.92,79.32 0 top
Q156  BSS138  [SOT23-3]  63.7,79.32 0 top
Q157  BSS138  [SOT23-3]  83.21,79.32 0 top
Q158  BSS138  [SOT23-3]  71.81,79.32 0 top
Q159  BSS138  [SOT23-3]  75.67,79.32 0 top
Q160  BSS138  [SOT23-3]  79.45,79.32 0 top
Q161  BSS138  [SOT23-3]  98.96,79.32 0 top
Q162  BSS138  [SOT23-3]  87.55,79.32 0 top
Q163  BSS138  [SOT23-3]  91.41,79.32 0 top
Q164  BSS138  [SOT23-3]  95.2,79.32 0 top
Q165  BSS138  [SOT23-3]  114.71,79.32 0 top
Q166  BSS138  [SOT23-3]  103.3,79.32 0 top
Q167  BSS138  [SOT23-3]  107.16,79.32 0 top
Q168  BSS138  [SOT23-3]  110.95,79.32 0 top
Q169  BSS138  [SOT23-3]  20.22,92.53 0 top
Q170  BSS138  [SOT23-3]  8.81,92.53 0 top
Q171  BSS138  [SOT23-3]  12.67,92.53 0 top
Q172  BSS138  [SOT23-3]  16.46,92.53 0 top
Q173  BSS138  [SOT23-3]  35.97,92.53 0 top
Q174  BSS138  [SOT23-3]  24.56,92.53 0 top
Q175  BSS138  [SOT23-3]  28.42,92.53 0 top
Q176  BSS138  [SOT23-3]  32.21,92.53 0 top
Q177  BSS138  [SOT23-3]  51.71,92.53 0 top
Q178  BSS138  [SOT23-3]  40.31,92.53 0 top
Q179  BSS138  [SOT23-3]  44.17,92.53 0 top
Q180  BSS138  [SOT23-3]  47.96,92.53 0 top
Q181  BSS138  [SOT23-3]  67.46,92.53 0 top
Q182  BSS138  [SOT23-3]  56.06,92.53 0 top
Q183  BSS138  [SOT23-3]  59.92,92.53 0 top
Q184  BSS138  [SOT23-3]  63.7,92.53 0 top
Q185  BSS138  [SOT23-3]  83.21,92.53 0 top
Q186  BSS138  [SOT23-3]  71.81,92.53 0 top
Q187  BSS138  [SOT23-3]  75.67,92.53 0 top
Q188  BSS138  [SOT23-3]  79.45,92.53 0 top
Q189  BSS138  [SOT23-3]  98.96,92.53 0 top
Q190  BSS138  [SOT23-3]  87.55,92.53 0 top
Q191  BSS138  [SOT23-3]  91.41,92.53 0 top
Q192  BSS138  [SOT23-3]  95.2,92.53 0 top
Q193  BSS138  [SOT23-3]  114.71,92.53 0 top
Q194  BSS138  [SOT23-3]  103.3,92.53 0 top
Q195  BSS138  [SOT23-3]  107.16,92.53 0 top
Q196  BSS138  [SOT23-3]  110.95,92.53 0 top
Q197  BSS138  [SOT23-3]  20.22,105.74 0 top
Q198  BSS138  [SOT23-3]  8.81,105.74 0 top
Q199  BSS138  [SOT23-3]  12.67,105.74 0 top
Q200  BSS138  [SOT23-3]  16.46,105.74 0 top
Q201  BSS138  [SOT23-3]  35.97,105.74 0 top
Q202  BSS138  [SOT23-3]  24.56,105.74 0 top
Q203  BSS138  [SOT23-3]  28.42,105.74 0 top
Q204  BSS138  [SOT23-3]  32.21,105.74 0 top
Q205  BSS138  [SOT23-3]  51.71,105.74 0 top
Q206  BSS138  [SOT23-3]  40.31,105.74 0 top
Q207  BSS138  [SOT23-3]  44.17,105.74 0 top
Q208  BSS138  [SOT23-3]  47.96,105.74 0 top
Q209  BSS138  [SOT23-3]  67.46,105.74 0 top
Q210  BSS138  [SOT23-3]  56.06,105.74 0 top
Q211  BSS138  [SOT23-3]  59.92,105.74 0 top
Q212  BSS138  [SOT23-3]  63.7,105.74 0 top
Q213  BSS138  [SOT23-3]  83.21,105.74 0 top
Q214  BSS138  [SOT23-3]  71.81,105.74 0 top
Q215  BSS138  [SOT23-3]  75.67,105.74 0 top
Q216  BSS138  [SOT23-3]  79.45,105.74 0 top
Q217  BSS138  [SOT23-3]  98.96,105.74 0 top
Q218  BSS138  [SOT23-3]  87.55,105.74 0 top
Q219  BSS138  [SOT23-3]  91.41,105.74 0 top
Q220  BSS138  [SOT23-3]  95.2,105.74 0 top
Q221  BSS138  [SOT23-3]  114.71,105.74 0 top
Q222  BSS138  [SOT23-3]  103.3,105.74 0 top
Q223  BSS138  [SOT23-3]  107.16,105.74 0 top
Q224  BSS138  [SOT23-3]  110.95,105.74 0 top
R1  10K  [0603-RES]  16.46,10.57 0 top
R2  10K  [0603-RES]  12.7,10.59 0 top
R3  10K  [0603-RES]  8.81,10.62 0 top
R4  10K  [0603-RES]  8.86,15.82 180 top
R5  10K  [0603-RES]  16.28,15.85 0 top
R6  10K  [0603-RES]  20.12,10.57 0 top
R7  10K  [0603-RES]  20.09,15.85 0 top
R8  10K  [0603-RES]  35.86,10.57 0 top
R9  10K  [0603-RES]  35.84,15.85 0 top
R10  10K  [0603-RES]  12.57,15.85 180 top
R11  10K  [0603-RES]  24.56,10.62 0 top
R12  10K  [0603-RES]  24.61,15.82 180 top
R13  10K  [0603-RES]  28.45,10.59 0 top
R14  10K  [0603-RES]  28.32,15.85 180 top
R15  10K  [0603-RES]  32.21,10.57 0 top
R16  10K  [0603-RES]  32.03,15.85 0 top
R17  10K  [0603-RES]  51.61,10.57 0 top
R18  10K  [0603-RES]  51.59,15.85 0 top
R19  10K  [0603-RES]  40.31,10.62 0 top
R20  10K  [0603-RES]  40.36,15.82 180 top
R21  10K  [0603-RES]  44.2,10.59 0 top
R22  10K  [0603-RES]  44.07,15.85 180 top
R23  10K  [0603-RES]  47.96,10.57 0 top
R24  10K  [0603-RES]  47.78,15.85 0 top
R25  10K  [0603-RES]  67.36,10.57 0 top
R26  10K  [0603-RES]  67.34,15.85 0 top
R27  10K  [0603-RES]  56.06,10.62 0 top
R28  10K  [0603-RES]  56.11,15.82 180 top
R29  10K  [0603-RES]  59.94,10.59 0 top
R30  10K  [0603-RES]  59.82,15.85 180 top
R31  10K  [0603-RES]  63.7,10.57 0 top
R32  10K  [0603-RES]  63.53,15.85 0 top
R33  10K  [0603-RES]  83.11,10.57 0 top
R34  10K  [0603-RES]  83.08,15.85 0 top
R35  10K  [0603-RES]  71.81,10.62 0 top
R36  10K  [0603-RES]  71.86,15.82 180 top
R37  10K  [0603-RES]  75.69,10.59 0 top
R38  10K  [0603-RES]  75.56,15.85 180 top
R39  10K  [0603-RES]  79.45,10.57 0 top
R40  10K  [0603-RES]  79.27,15.85 0 top
R41  10K  [0603-RES]  98.86,10.57 0 top
R42  10K  [0603-RES]  98.83,15.85 0 top
R43  10K  [0603-RES]  87.55,10.62 0 top
R44  10K  [0603-RES]  87.6,15.82 180 top
R45  10K  [0603-RES]  91.44,10.59 0 top
R46  10K  [0603-RES]  91.31,15.85 180 top
R47  10K  [0603-RES]  95.2,10.57 0 top
R48  10K  [0603-RES]  95.02,15.85 0 top
R49  10K  [0603-RES]  114.6,10.57 0 top
R50  10K  [0603-RES]  114.58,15.85 0 top
R51  10K  [0603-RES]  103.3,10.62 0 top
R52  10K  [0603-RES]  103.35,15.82 180 top
R53  10K  [0603-RES]  107.19,10.59 0 top
R54  10K  [0603-RES]  107.06,15.85 180 top
R55  10K  [0603-RES]  110.95,10.57 0 top
R56  10K  [0603-RES]  110.77,15.85 0 top
R57  10K  [0603-RES]  20.12,23.77 0 top
R58  10K  [0603-RES]  20.09,29.06 0 top
R59  10K  [0603-RES]  8.81,23.83 0 top
R60  10K  [0603-RES]  8.86,29.03 180 top
R61  10K  [0603-RES]  12.7,23.8 0 top
R62  10K  [0603-RES]  12.57,29.06 180 top
R63  10K  [0603-RES]  16.46,23.77 0 top
R64  10K  [0603-RES]  16.28,29.06 0 top
R65  10K  [0603-RES]  35.86,23.77 0 top
R66  10K  [0603-RES]  35.84,29.06 0 top
R67  10K  [0603-RES]  24.56,23.83 0 top
R68  10K  [0603-RES]  24.61,29.03 180 top
R69  10K  [0603-RES]  28.45,23.8 0 top
R70  10K  [0603-RES]  28.32,29.06 180 top
R71  10K  [0603-RES]  32.21,23.77 0 top
R72  10K  [0603-RES]  32.03,29.06 0 top
R73  10K  [0603-RES]  51.61,23.77 0 top
R74  10K  [0603-RES]  51.59,29.06 0 top
R75  10K  [0603-RES]  40.31,23.83 0 top
R76  10K  [0603-RES]  40.36,29.03 180 top
R77  10K  [0603-RES]  44.2,23.8 0 top
R78  10K  [0603-RES]  44.07,29.06 180 top
R79  10K  [0603-RES]  47.96,23.77 0 top
R80  10K  [0603-RES]  47.78,29.06 0 top
R81  10K  [0603-RES]  67.36,23.77 0 top
R82  10K  [0603-RES]  67.34,29.06 0 top
R83  10K  [0603-RES]  56.06,23.83 0 top
R84  10K  [0603-RES]  56.11,29.03 180 top
R85  10K  [0603-RES]  59.94,23.8 0 top
R86  10K  [0603-RES]  59.82,29.06 180 top
R87  10K  [0603-RES]  63.7,23.77 0 top
R88  10K  [0603-RES]  63.53,29.06 0 top
R89  10K  [0603-RES]  83.11,23.77 0 top
R90  10K  [0603-RES]  83.08,29.06 0 top
R91  10K  [0603-RES]  71.81,23.83 0 top
R92  10K  [0603-RES]  71.86,29.03 180 top
R93  10K  [0603-RES]  75.69,23.8 0 top
R94  10K  [0603-RES]  75.56,29.06 180 top
R95  10K  [0603-RES]  79.45,23.77 0 top
R96  10K  [0603-RES]  79.27,29.06 0 top
R97  10K  [0603-RES]  98.86,23.77 0 top
R98  10K  [0603-RES]  98.83,29.06 0 top
R99  10K  [0603-RES]  87.55,23.83 0 top
R100  10K  [0603-RES]  87.6,29.03 180 top
R101  10K  [0603-RES]  91.44,23.8 0 top
R102  10K  [0603-RES]  91.31,29.06 180 top
R103  10K  [0603-RES]  95.2,23.77 0 top
R104  10K  [0603-RES]  95.02,29.06 0 top
R105  10K  [0603-RES]  114.6,23.77 0 top
R106  10K  [0603-RES]  114.58,29.06 0 top
R107  10K  [0603-RES]  103.3,23.83 0 top
R108  10K  [0603-RES]  103.35,29.03 180 top
R109  10K  [0603-RES]  107.19,23.8 0 top
R110  10K  [0603-RES]  107.06,29.06 180 top
R111  10K  [0603-RES]  110.95,23.77 0 top
R112  10K  [0603-RES]  110.77,29.06 0 top
R113  10K  [0603-RES]  20.12,36.98 0 top
R114  10K  [0603-RES]  20.09,42.27 0 top
R115  10K  [0603-RES]  8.81,37.03 0 top
R116  10K  [0603-RES]  8.86,42.24 180 top
R117  10K  [0603-RES]  12.7,37.01 0 top
R118  10K  [0603-RES]  12.57,42.27 180 top
R119  10K  [0603-RES]  16.46,36.98 0 top
R120  10K  [0603-RES]  16.28,42.27 0 top
R121  10K  [0603-RES]  35.86,36.98 0 top
R122  10K  [0603-RES]  35.84,42.27 0 top
R123  10K  [0603-RES]  24.56,37.03 0 top
R124  10K  [0603-RES]  24.61,42.24 180 top
R125  10K  [0603-RES]  28.45,37.01 0 top
R126  10K  [0603-RES]  28.32,42.27 180 top
R127  10K  [0603-RES]  32.21,36.98 0 top
R128  10K  [0603-RES]  32.03,42.27 0 top
R129  10K  [0603-RES]  51.61,36.98 0 top
R130  10K  [0603-RES]  51.59,42.27 0 top
R131  10K  [0603-RES]  40.31,37.03 0 top
R132  10K  [0603-RES]  40.36,42.24 180 top
R133  10K  [0603-RES]  44.2,37.01 0 top
R134  10K  [0603-RES]  44.07,42.27 180 top
R135  10K  [0603-RES]  47.96,36.98 0 top
R136  10K  [0603-RES]  47.78,42.27 0 top
R137  10K  [0603-RES]  67.36,36.98 0 top
R138  10K  [0603-RES]  67.34,42.27 0 top
R139  10K  [0603-RES]  56.06,37.03 0 top
R140  10K  [0603-RES]  56.11,42.24 180 top
R141  10K  [0603-RES]  59.94,37.01 0 top
R142  10K  [0603-RES]  59.82,42.27 180 top
R143  10K  [0603-RES]  63.7,36.98 0 top
R144  10K  [0603-RES]  63.53,42.27 0 top
R145  10K  [0603-RES]  83.11,36.98 0 top
R146  10K  [0603-RES]  83.08,42.27 0 top
R147  10K  [0603-RES]  71.81,37.03 0 top
R148  10K  [0603-RES]  71.86,42.24 180 top
R149  10K  [0603-RES]  75.69,37.01 0 top
R150  10K  [0603-RES]  75.56,42.27 180 top
R151  10K  [0603-RES]  79.45,36.98 0 top
R152  10K  [0603-RES]  79.27,42.27 0 top
R153  10K  [0603-RES]  98.86,36.98 0 top
R154  10K  [0603-RES]  98.83,42.27 0 top
R155  10K  [0603-RES]  87.55,37.03 0 top
R156  10K  [0603-RES]  87.6,42.24 180 top
R157  10K  [0603-RES]  91.44,37.01 0 top
R158  10K  [0603-RES]  91.31,42.27 180 top
R159  10K  [0603-RES]  95.2,36.98 0 top
R160  10K  [0603-RES]  95.02,42.27 0 top
R161  10K  [0603-RES]  114.6,36.98 0 top
R162  10K  [0603-RES]  114.58,42.27 0 top
R163  10K  [0603-RES]  103.3,37.03 0 top
R164  10K  [0603-RES]  103.35,42.24 180 top
R165  10K  [0603-RES]  107.19,37.01 0 top
R166  10K  [0603-RES]  107.06,42.27 180 top
R167  10K  [0603-RES]  110.95,36.98 0 top
R168  10K  [0603-RES]  110.77,42.27 0 top
R169  10K  [0603-RES]  20.12,50.19 0 top
R170  10K  [0603-RES]  20.09,55.47 0 top
R171  10K  [0603-RES]  8.81,50.24 0 top
R172  10K  [0603-RES]  8.86,55.45 180 top
R173  10K  [0603-RES]  12.7,50.22 0 top
R174  10K  [0603-RES]  12.57,55.47 180 top
R175  10K  [0603-RES]  16.46,50.19 0 top
R176  10K  [0603-RES]  16.28,55.47 0 top
R177  10K  [0603-RES]  35.86,50.19 0 top
R178  10K  [0603-RES]  35.84,55.47 0 top
R179  10K  [0603-RES]  24.56,50.24 0 top
R180  10K  [0603-RES]  24.61,55.45 180 top
R181  10K  [0603-RES]  28.45,50.22 0 top
R182  10K  [0603-RES]  28.32,55.47 180 top
R183  10K  [0603-RES]  32.21,50.19 0 top
R184  10K  [0603-RES]  32.03,55.47 0 top
R185  10K  [0603-RES]  51.61,50.19 0 top
R186  10K  [0603-RES]  51.59,55.47 0 top
R187  10K  [0603-RES]  40.31,50.24 0 top
R188  10K  [0603-RES]  40.36,55.45 180 top
R189  10K  [0603-RES]  44.2,50.22 0 top
R190  10K  [0603-RES]  44.07,55.47 180 top
R191  10K  [0603-RES]  47.96,50.19 0 top
R192  10K  [0603-RES]  47.78,55.47 0 top
R193  10K  [0603-RES]  67.36,50.19 0 top
R194  10K  [0603-RES]  67.34,55.47 0 top
R195  10K  [0603-RES]  56.06,50.24 0 top
R196  10K  [0603-RES]  56.11,55.45 180 top
R197  10K  [0603-RES]  59.94,50.22 0 top
R198  10K  [0603-RES]  59.82,55.47 180 top
R199  10K  [0603-RES]  63.7,50.19 0 top
R200  10K  [0603-RES]  63.53,55.47 0 top
R201  10K  [0603-RES]  83.11,50.19 0 top
R202  10K  [0603-RES]  83.08,55.47 0 top
R203  10K  [0603-RES]  71.81,50.24 0 top
R204  10K  [0603-RES]  71.86,55.45 180 top
R205  10K  [0603-RES]  75.69,50.22 0 top
R206  10K  [0603-RES]  75.56,55.47 180 top
R207  10K  [0603-RES]  79.45,50.19 0 top
R208  10K  [0603-RES]  79.27,55.47 0 top
R209  10K  [0603-RES]  98.86,50.19 0 top
R210  10K  [0603-RES]  98.83,55.47 0 top
R211  10K  [0603-RES]  87.55,50.24 0 top
R212  10K  [0603-RES]  87.6,55.45 180 top
R213  10K  [0603-RES]  91.44,50.22 0 top
R214  10K  [0603-RES]  91.31,55.47 180 top
R215  10K  [0603-RES]  95.2,50.19 0 top
R216  10K  [0603-RES]  95.02,55.47 0 top
R217  10K  [0603-RES]  114.6,50.19 0 top
R218  10K  [0603-RES]  114.58,55.47 0 top
R219  10K  [0603-RES]  103.3,50.24 0 top
R220  10K  [0603-RES]  103.35,55.45 180 top
R221  10K  [0603-RES]  107.19,50.22 0 top
R222  10K  [0603-RES]  107.06,55.47 180 top
R223  10K  [0603-RES]  110.95,50.19 0 top
R224  10K  [0603-RES]  110.77,55.47 0 top
R225  10K  [0603-RES]  20.12,63.4 0 top
R226  10K  [0603-RES]  20.09,68.68 0 top
R227  10K  [0603-RES]  8.81,63.45 0 top
R228  10K  [0603-RES]  8.86,68.66 180 top
R229  10K  [0603-RES]  12.7,63.42 0 top
R230  10K  [0603-RES]  12.57,68.68 180 top
R231  10K  [0603-RES]  16.46,63.4 0 top
R232  10K  [0603-RES]  16.28,68.68 0 top
R233  10K  [0603-RES]  35.86,63.4 0 top
R234  10K  [0603-RES]  35.84,68.68 0 top
R235  10K  [0603-RES]  24.56,63.45 0 top
R236  10K  [0603-RES]  24.61,68.66 180 top
R237  10K  [0603-RES]  28.45,63.42 0 top
R238  10K  [0603-RES]  28.32,68.68 180 top
R239  10K  [0603-RES]  32.21,63.4 0 top
R240  10K  [0603-RES]  32.03,68.68 0 top
R241  10K  [0603-RES]  51.61,63.4 0 top
R242  10K  [0603-RES]  51.59,68.68 0 top
R243  10K  [0603-RES]  40.31,63.45 0 top
R244  10K  [0603-RES]  40.36,68.66 180 top
R245  10K  [0603-RES]  44.2,63.42 0 top
R246  10K  [0603-RES]  44.07,68.68 180 top
R247  10K  [0603-RES]  47.96,63.4 0 top
R248  10K  [0603-RES]  47.78,68.68 0 top
R249  10K  [0603-RES]  67.36,63.4 0 top
R250  10K  [0603-RES]  67.34,68.68 0 top
R251  10K  [0603-RES]  56.06,63.45 0 top
R252  10K  [0603-RES]  56.11,68.66 180 top
R253  10K  [0603-RES]  59.94,63.42 0 top
R254  10K  [0603-RES]  59.82,68.68 180 top
R255  10K  [0603-RES]  63.7,63.4 0 top
R256  10K  [0603-RES]  63.53,68.68 0 top
R257  10K  [0603-RES]  83.11,63.4 0 top
R258  10K  [0603-RES]  83.08,68.68 0 top
R259  10K  [0603-RES]  71.81,63.45 0 top
R260  10K  [0603-RES]  71.86,68.66 180 top
R261  10K  [0603-RES]  75.69,63.42 0 top
R262  10K  [0603-RES]  75.56,68.68 180 top
R263  10K  [0603-RES]  79.45,63.4 0 top
R264  10K  [0603-RES]  79.27,68.68 0 top
R265  10K  [0603-RES]  98.86,63.4 0 top
R266  10K  [0603-RES]  98.83,68.68 0 top
R267  10K  [0603-RES]  87.55,63.45 0 top
R268  10K  [0603-RES]  87.6,68.66 180 top
R269  10K  [0603-RES]  91.44,63.42 0 top
R270  10K  [0603-RES]  91.31,68.68 180 top
R271  10K  [0603-RES]  95.2,63.4 0 top
R272  10K  [0603-RES]  95.02,68.68 0 top
R273  10K  [0603-RES]  114.6,63.4 0 top
R274  10K  [0603-RES]  114.58,68.68 0 top
R275  10K  [0603-RES]  103.3,63.45 0 top
R276  10K  [0603-RES]  103.35,68.66 180 top
R277  10K  [0603-RES]  107.19,63.42 0 top
R278  10K  [0603-RES]  107.06,68.68 180 top
R279  10K  [0603-RES]  110.95,63.4 0 top
R280  10K  [0603-RES]  110.77,68.68 0 top
R281  10K  [0603-RES]  20.12,76.61 0 top
R282  10K  [0603-RES]  20.09,81.89 0 top
R283  10K  [0603-RES]  8.81,76.66 0 top
R284  10K  [0603-RES]  8.86,81.86 180 top
R285  10K  [0603-RES]  12.7,76.63 0 top
R286  10K  [0603-RES]  12.57,81.89 180 top
R287  10K  [0603-RES]  16.46,76.61 0 top
R288  10K  [0603-RES]  16.28,81.89 0 top
R289  10K  [0603-RES]  35.86,76.61 0 top
R290  10K  [0603-RES]  35.84,81.89 0 top
R291  10K  [0603-RES]  24.56,76.66 0 top
R292  10K  [0603-RES]  24.61,81.86 180 top
R293  10K  [0603-RES]  28.45,76.63 0 top
R294  10K  [0603-RES]  28.32,81.89 180 top
R295  10K  [0603-RES]  32.21,76.61 0 top
R296  10K  [0603-RES]  32.03,81.89 0 top
R297  10K  [0603-RES]  51.61,76.61 0 top
R298  10K  [0603-RES]  51.59,81.89 0 top
R299  10K  [0603-RES]  40.31,76.66 0 top
R300  10K  [0603-RES]  40.36,81.86 180 top
R301  10K  [0603-RES]  44.2,76.63 0 top
R302  10K  [0603-RES]  44.07,81.89 180 top
R303  10K  [0603-RES]  47.96,76.61 0 top
R304  10K  [0603-RES]  47.78,81.89 0 top
R305  10K  [0603-RES]  67.36,76.61 0 top
R306  10K  [0603-RES]  67.34,81.89 0 top
R307  10K  [0603-RES]  56.06,76.66 0 top
R308  10K  [0603-RES]  56.11,81.86 180 top
R309  10K  [0603-RES]  59.94,76.63 0 top
R310  10K  [0603-RES]  59.82,81.89 180 top
R311  10K  [0603-RES]  63.7,76.61 0 top
R312  10K  [0603-RES]  63.53,81.89 0 top
R313  10K  [0603-RES]  83.11,76.61 0 top
R314  10K  [0603-RES]  83.08,81.89 0 top
R315  10K  [0603-RES]  71.81,76.66 0 top
R316  10K  [0603-RES]  71.86,81.86 180 top
R317  10K  [0603-RES]  75.69,76.63 0 top
R318  10K  [0603-RES]  75.56,81.89 180 top
R319  10K  [0603-RES]  79.45,76.61 0 top
R320  10K  [0603-RES]  79.27,81.89 0 top
R321  10K  [0603-RES]  98.86,76.61 0 top
R322  10K  [0603-RES]  98.83,81.89 0 top
R323  10K  [0603-RES]  87.55,76.66 0 top
R324  10K  [0603-RES]  87.6,81.86 180 top
R325  10K  [0603-RES]  91.44,76.63 0 top
R326  10K  [0603-RES]  91.31,81.89 180 top
R327  10K  [0603-RES]  95.2,76.61 0 top
R328  10K  [0603-RES]  95.02,81.89 0 top
R329  10K  [0603-RES]  114.6,76.61 0 top
R330  10K  [0603-RES]  114.58,81.89 0 top
R331  10K  [0603-RES]  103.3,76.66 0 top
R332  10K  [0603-RES]  103.35,81.86 180 top
R333  10K  [0603-RES]  107.19,76.63 0 top
R334  10K  [0603-RES]  107.06,81.89 180 top
R335  10K  [0603-RES]  110.95,76.61 0 top
R336  10K  [0603-RES]  110.77,81.89 0 top
R337  10K  [0603-RES]  20.12,89.81 0 top
R338  10K  [0603-RES]  20.09,95.1 0 top
R339  10K  [0603-RES]  8.81,89.87 0 top
R340  10K  [0603-RES]  8.86,95.07 180 top
R341  10K  [0603-RES]  12.7,89.84 0 top
R342  10K  [0603-RES]  12.57,95.1 180 top
R343  10K  [0603-RES]  16.46,89.81 0 top
R344  10K  [0603-RES]  16.28,95.1 0 top
R345  10K  [0603-RES]  35.86,89.81 0 top
R346  10K  [0603-RES]  35.84,95.1 0 top
R347  10K  [0603-RES]  24.56,89.87 0 top
R348  10K  [0603-RES]  24.61,95.07 180 top
R349  10K  [0603-RES]  28.45,89.84 0 top
R350  10K  [0603-RES]  28.32,95.1 180 top
R351  10K  [0603-RES]  32.21,89.81 0 top
R352  10K  [0603-RES]  32.03,95.1 0 top
R353  10K  [0603-RES]  51.61,89.81 0 top
R354  10K  [0603-RES]  51.59,95.1 0 top
R355  10K  [0603-RES]  40.31,89.87 0 top
R356  10K  [0603-RES]  40.36,95.07 180 top
R357  10K  [0603-RES]  44.2,89.84 0 top
R358  10K  [0603-RES]  44.07,95.1 180 top
R359  10K  [0603-RES]  47.96,89.81 0 top
R360  10K  [0603-RES]  47.78,95.1 0 top
R361  10K  [0603-RES]  67.36,89.81 0 top
R362  10K  [0603-RES]  67.34,95.1 0 top
R363  10K  [0603-RES]  56.06,89.87 0 top
R364  10K  [0603-RES]  56.11,95.07 180 top
R365  10K  [0603-RES]  59.94,89.84 0 top
R366  10K  [0603-RES]  59.82,95.1 180 top
R367  10K  [0603-RES]  63.7,89.81 0 top
R368  10K  [0603-RES]  63.53,95.1 0 top
R369  10K  [0603-RES]  83.11,89.81 0 top
R370  10K  [0603-RES]  83.08,95.1 0 top
R371  10K  [0603-RES]  71.81,89.87 0 top
R372  10K  [0603-RES]  71.86,95.07 180 top
R373  10K  [0603-RES]  75.69,89.84 0 top
R374  10K  [0603-RES]  75.56,95.1 180 top
R375  10K  [0603-RES]  79.45,89.81 0 top
R376  10K  [0603-RES]  79.27,95.1 0 top
R377  10K  [0603-RES]  98.86,89.81 0 top
R378  10K  [0603-RES]  98.83,95.1 0 top
R379  10K  [0603-RES]  87.55,89.87 0 top
R380  10K  [0603-RES]  87.6,95.07 180 top
R381  10K  [0603-RES]  91.44,89.84 0 top
R382  10K  [0603-RES]  91.31,95.1 180 top
R383  10K  [0603-RES]  95.2,89.81 0 top
R384  10K  [0603-RES]  95.02,95.1 0 top
R385  10K  [0603-RES]  114.6,89.81 0 top
R386  10K  [0603-RES]  114.58,95.1 0 top
R387  10K  [0603-RES]  103.3,89.87 0 top
R388  10K  [0603-RES]  103.35,95.07 180 top
R389  10K  [0603-RES]  107.19,89.84 0 top
R390  10K  [0603-RES]  107.06,95.1 180 top
R391  10K  [0603-RES]  110.95,89.81 0 top
R392  10K  [0603-RES]  110.77,95.1 0 top
R393  10K  [0603-RES]  20.12,103.02 0 top
R394  10K  [0603-RES]  20.09,108.31 0 top
R395  10K  [0603-RES]  8.81,103.07 0 top
R396  10K  [0603-RES]  8.86,108.28 180 top
R397  10K  [0603-RES]  12.7,103.05 0 top
R398  10K  [0603-RES]  12.57,108.31 180 top
R399  10K  [0603-RES]  16.46,103.02 0 top
R400  10K  [0603-RES]  16.28,108.31 0 top
R401  10K  [0603-RES]  35.86,103.02 0 top
R402  10K  [0603-RES]  35.84,108.31 0 top
R403  10K  [0603-RES]  24.56,103.07 0 top
R404  10K  [0603-RES]  24.61,108.28 180 top
R405  10K  [0603-RES]  28.45,103.05 0 top
R406  10K  [0603-RES]  28.32,108.31 180 top
R407  10K  [0603-RES]  32.21,103.02 0 top
R408  10K  [0603-RES]  32.03,108.31 0 top
R409  10K  [0603-RES]  51.61,103.02 0 top
R410  10K  [0603-RES]  51.59,108.31 0 top
R411  10K  [0603-RES]  40.31,103.07 0 top
R412  10K  [0603-RES]  40.36,108.28 180 top
R413  10K  [0603-RES]  44.2,103.05 0 top
R414  10K  [0603-RES]  44.07,108.31 180 top
R415  10K  [0603-RES]  47.96,103.02 0 top
R416  10K  [0603-RES]  47.78,108.31 0 top
R417  10K  [0603-RES]  67.36,103.02 0 top
R418  10K  [0603-RES]  67.34,108.31 0 top
R419  10K  [0603-RES]  56.06,103.07 0 top
R420  10K  [0603-RES]  56.11,108.28 180 top
R421  10K  [0603-RES]  59.94,103.05 0 top
R422  10K  [0603-RES]  59.82,108.31 180 top
R423  10K  [0603-RES]  63.7,103.02 0 top
R424  10K  [0603-RES]  63.53,108.31 0 top
R425  10K  [0603-RES]  83.11,103.02 0 top
R426  10K  [0603-RES]  83.08,108.31 0 top
R427  10K  [0603-RES]  71.81,103.07 0 top
R428  10K  [0603-RES]  71.86,108.28 180 top
R429  10K  [0603-RES]  75.69,103.05 0 top
R430  10K  [0603-RES]  75.56,108.31 180 top
R431  10K  [0603-RES]  79.45,103.02 0 top
R432  10K  [0603-RES]  79.27,108.31 0 top
R433  10K  [0603-RES]  98.86,103.02 0 top
R434  10K  [0603-RES]  98.83,108.31 0 top
R435  10K  [0603-RES]  87.55,103.07 0 top
R436  10K  [0603-RES]  87.6,108.28 180 top
R437  10K  [0603-RES]  91.44,103.05 0 top
R438  10K  [0603-RES]  91.31,108.31 180 top
R439  10K  [0603-RES]  95.2,103.02 0 top
R440  10K  [0603-RES]  95.02,108.31 0 top
R441  10K  [0603-RES]  114.6,103.02 0 top
R442  10K  [0603-RES]  114.58,108.31 0 top
R443  10K  [0603-RES]  103.3,103.07 0 top
R444  10K  [0603-RES]  103.35,108.28 180 top
R445  10K  [0603-RES]  107.19,103.05 0 top
R446  10K  [0603-RES]  107.06,108.31 180 top
R447  10K  [0603-RES]  110.95,103.02 0 top
R448  10K  [0603-RES]  110.77,108.31 0 top

## Library data of the parts
E$1 E$4 E$5 JP3 JP4 JP7 JP8 JP11 JP12 JP15 JP16 JP19 JP20 JP23 JP24 JP27 JP28 JP31 JP32 JP35 JP36 JP39 JP40 JP43 JP44 JP47 JP48 JP51 JP52 JP55 JP56 JP59 JP60 JP63 JP64 JP67 JP68 JP71 JP72 JP75 JP76 JP79 JP80 JP83 JP84 JP87 JP88 JP91 JP92 JP95 JP96 JP99 JP100 JP103 JP104 JP107 JP108 JP111 JP112 JP115 JP116 JP119 JP120 JP123 JP124 JP127 JP128 JP131 JP132 JP135 JP136 JP139 JP140 JP143 JP144 JP147 JP148 JP151 JP152 JP155 JP156 JP159 JP160 JP163 JP164 JP167 JP168 JP171 JP172 JP175 JP176 JP179 JP180 JP183 JP184 JP187 JP188 JP191 JP192 JP195 JP196 JP199 JP200 JP203 JP204 JP207 JP208 JP211 JP212 JP215 JP216 JP219 JP220 JP223 JP224 LOGO1-LOGO112 = SparkFun-Aesthetics
JP1 JP2 JP5 JP6 JP9 JP10 JP13 JP14 JP17 JP18 JP21 JP22 JP25 JP26 JP29 JP30 JP33 JP34 JP37 JP38 JP41 JP42 JP45 JP46 JP49 JP50 JP53 JP54 JP57 JP58 JP61 JP62 JP65 JP66 JP69 JP70 JP73 JP74 JP77 JP78 JP81 JP82 JP85 JP86 JP89 JP90 JP93 JP94 JP97 JP98 JP101 JP102 JP105 JP106 JP109 JP110 JP113 JP114 JP117 JP118 JP121 JP122 JP125 JP126 JP129 JP130 JP133 JP134 JP137 JP138 JP141 JP142 JP145 JP146 JP149 JP150 JP153 JP154 JP157 JP158 JP161 JP162 JP165 JP166 JP169 JP170 JP173 JP174 JP177 JP178 JP181 JP182 JP185 JP186 JP189 JP190 JP193 JP194 JP197 JP198 JP201 JP202 JP205 JP206 JP209 JP210 JP213 JP214 JP217 JP218 JP221 JP222 Q1-Q224 R1-R448 = SparkFun